# Altium PCB DAPLinkTiny.PcbDoc
Units mil, origin at the board's own origin, x right, y up, seen from the top; angles counter-clockwise.
Board outline 955.73 x 413.27 mil, 4 copper layers (Top Layer, POWER, GND, Bottom Layer), stack 23.756 mil thick; 17 components, 39 nets, 106 pads, 51 vias.
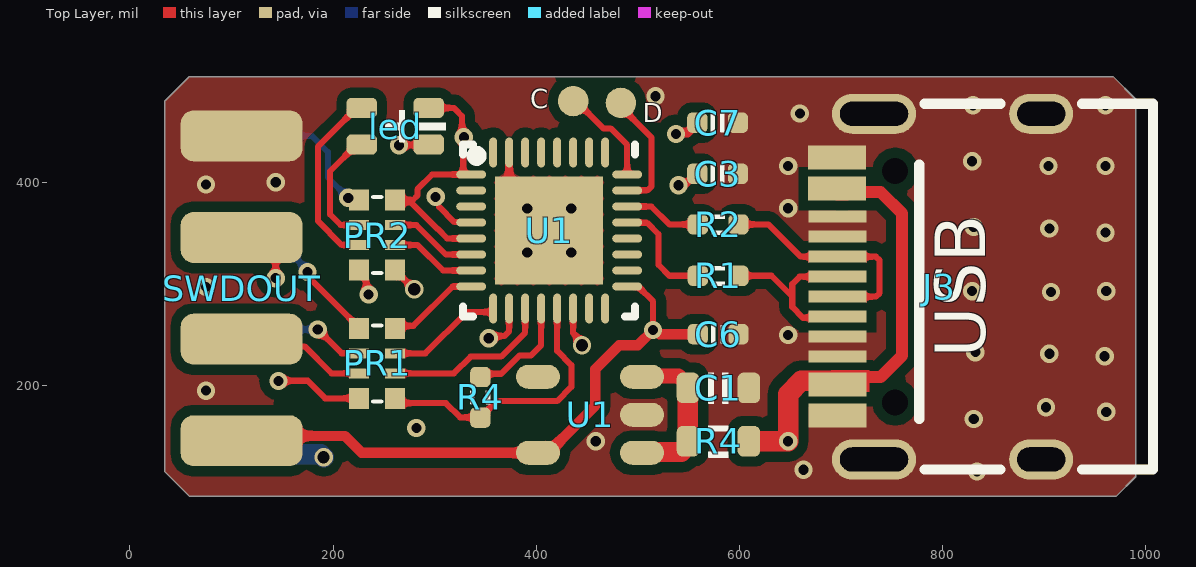
[diagram p0: Top Layer view]
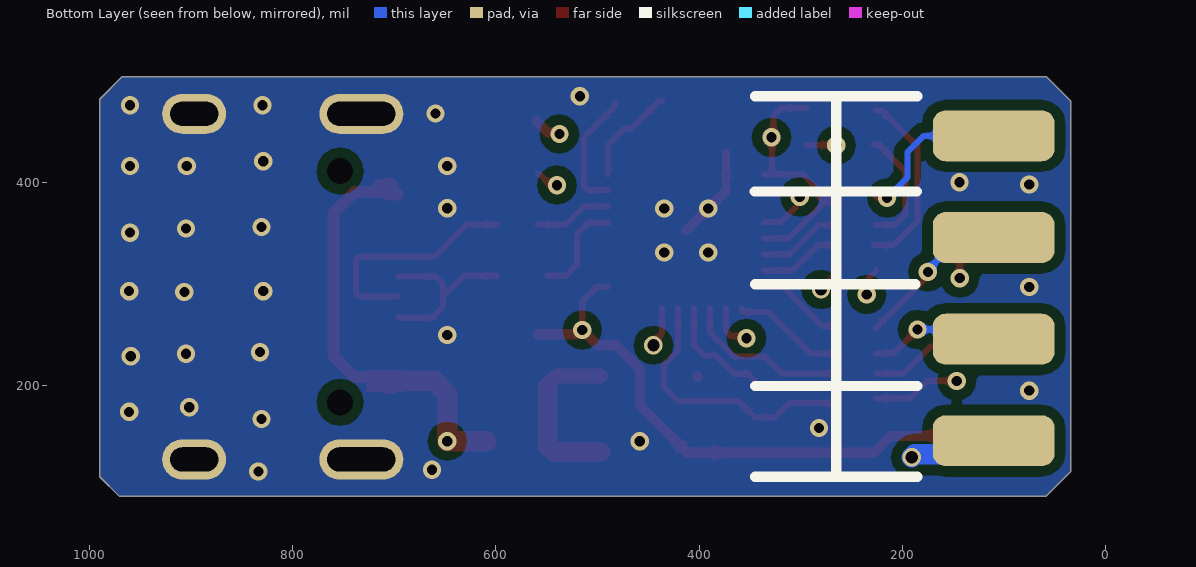
[diagram p1: Bottom Layer view, seen from below]
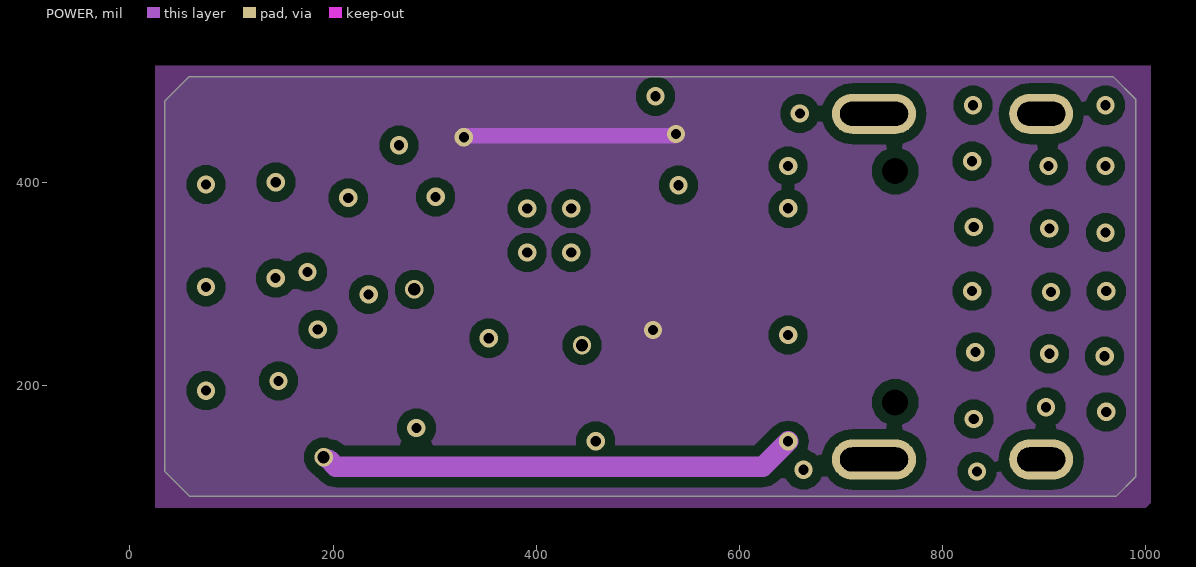
[diagram p2: POWER]
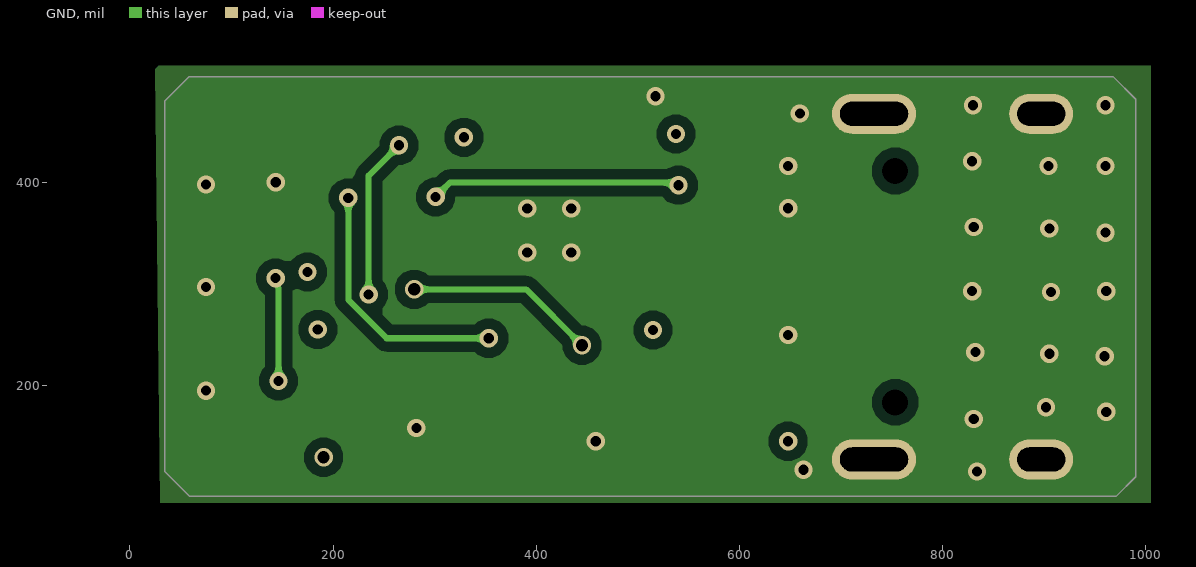
[diagram p3: GND]
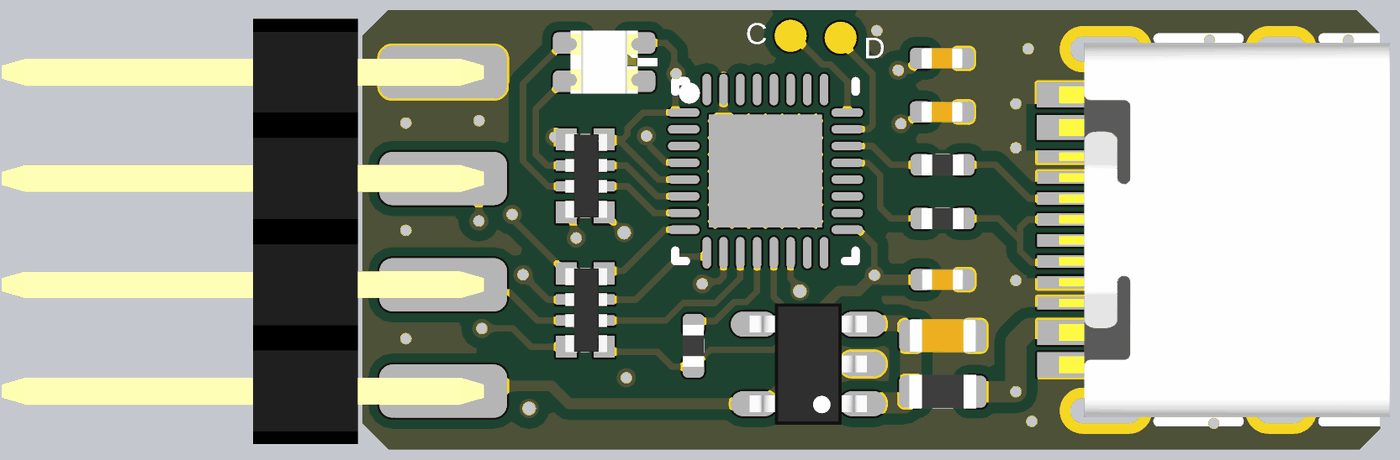
[diagram p4: 3D render of the assembled board from above, using the file's embedded part models]

## Layer stack, top to bottom
Top Solder: solder mask 0.4, Solder Resist, Dk 3.5
Top Layer: signal copper 1.4
Dielectric 2: prepreg 2.8, PP-006, Dk 4.1
POWER: signal copper 1.378
Dielectric 1: dielectric 12.6, FR-4, Dk 4.8
GND: signal copper 1.378
Dielectric 3: prepreg 2.8, PP-006, Dk 4.1
Bottom Layer: signal copper 1.4
Bottom Solder: solder mask 0.4, Solder Resist, Dk 3.5

## Board outline
34.27,115.73 58.9,91.1 691.96,91.1 970.6,91.1 990,110.5 990,482.18 967.8,504.38 58.36,504.38 34.27,480.29

## Design rules (kind name [scope] priority, off if disabled: settings)
Clearance ClearancePolygon [InPolygon] p1: gap=10 ignorepadtopadclearanceinfootprint=FALSE
Clearance [All] p2: gap=6 ignorepadtopadclearanceinfootprint=FALSE except(0: Arc-Hole Track-Hole SMDPad-Hole THPad-Hole Via-Hole Fill-Hole Poly-Hole Region-Hole Text-Hole)
ComponentClearance [All] p1: gap=0 collisioncheckmode=3 verticalgap=0 showdistances=FALSE
Height [All] p1: minheight=0 maxheight=5000 prefheight=500
HoleSize [All] p1: absolutevalues=TRUE maxlimit=200 minlimit=1 maxpercent=80.000 minpercent=20.000
HoleToHoleClearance [All] p1: gap=6 allowstackedmicrovias=TRUE
MinimumSolderMaskSliver [All] p1: minsoldermaskwidth=0
PolygonConnect [All] p1: connectstyle=Direct reliefconductorwidth=10 reliefentries=4 polygonreliefangle="90 Angle" airgapwidth=10
RoutingVias [All] p1: holewidth=12 width=24 viastyle="Through Hole" minholewidth=8 minwidth=15 maxholewidth=28 maxwidth=50
SMDNeckDown [All] p1: percent=50.000
SilkToSilkClearance [All] p1: silktosilkclearance=0
SilkToSolderMaskClearance [IsPad] p1: minsilkscreentomaskgap=0 clearancetoexposedcopper=TRUE
SolderMaskExpansion [All] p1: expansion=2 istentingtop=FALSE
Width [All] p1: maxlimit=50 minlimit=6 preferedwidth=6
23 further rules are at their usual default settings.

## Classes and differential pairs
component class JLink_ARM-OB_072_Sch: C1 C3 J1 R4 R6 R8 STM1 SWDOUT1 TypeC1

## Components (designator, comment, footprint, x,y, rotation, side; value= is the part's Value field where it differs from the comment)
C "Comment" PAD.04X.04#1 436.34,480.29 r0 top
C1 "10uF" CAP_0603 579.26,197.99 r180 top value=0.1u
C3 "100nF" CAP_0402 578.5,408.64 r180 top value=0.1u
C6 "100nF" CAP_0402 579,250.84 r180 top value=0.1u
C7 "100nF" CAP_0402 578.5,459.03 r180 top value=0.1u
D "Comment" PAD.04X.04#2 483.29,478.44 r0 top
J3 "USB type C" "USB Type-C-16Pin_A" 897,297.6 r90 top
led "Comment" LED_1616_RGB 261.19,455.53 r0 top
PR1 "100R" 0402_4R 244.46,221.2 r90 top
PR2 "2K" 0402_4R 244.46,347.47 r90 top
R1 "22R" RES_0402_2 579,308.32 r180 top
R2 "22R" RES_0402_2 579,358.85 r180 top
R4 "0R" RES_0603 579.26,145.43 r0 top value=680R
R4 "100R" RES_0402 345,188.68 r90 top value=470pf (schematic designator C2)
SWDOUT "HDR2x4_2.54" HDR2X4_2.54_180H 110,146 r180 top
U1 "Comment" SOT23-5 452.98,171.53 r180 top
U1 "Comment" QFN32_4*4 412.72,352.89 r0 top locked

## Footprints (in the part's own frame and the unit in brackets; to place one, negate y for a bottom-side part, rotate by r counter-clockwise, add the part's x,y. Pads: shape width x height; smd on the part's side, far side on the other; paste and mask are expansions set on the pad)
0402_4R [mm]
  rect 0.525x0.5 smd: 1(-0.85,-0.425) 4(0.9,-0.425) 5(0.9,0.475) 8(-0.85,0.475)
  rect 0.25x0.5 smd: 2(-0.225,-0.425) 3(0.275,-0.425) 6(0.275,0.475) 7(-0.225,0.475)
  silkscreen extent -0.93,-0.08 0.97,0.12, body extent -0.97,-0.5 1.03,0.5, height 0.45
CAP_0402 [mil]
  rrect50% 20x20 smd: 1(-20,0) 2(20,0)
  silkscreen extent -7,-9 7,9, body extent -20,-10 20,10, height 20
CAP_0603 [mil]
  rrect50% 22x30 smd: 1(-30,0) 2(30,0)
  silkscreen extent -10,-15 10,15, body extent -31,-16 31,16, height 31
HDR2X4_2.54_180H [mil]
  rrect50% 120x50 smd: 1(0,0) 3(0,-100) 5(0,-200) 7(0,-300)
  rrect50% 120x50 smd far side: 2(0,0) 4(0,-100) 6(0,-200) 8(0,-300)
  body extent -38,-350 415,50, height 100
LED_1616_RGB [mil]
  rrect50% 30x20 smd: 1(-33,-18) 2(-33,18) 3(33,18) 4(33,-18)
  silkscreen extent -10,-16 50,16, body extent -31,-30 31,30, height 13
PAD.04X.04#1 [mil]
  rrect100% 30x30 smd paste-78.74: TP2(0,0)
PAD.04X.04#2 [mil]
  rrect100% 30x30 smd paste-78.74: TP3(0,0)
QFN32_4*4 [mm]
  oval 0.75x0.2 smd: 1(-1.95,1.4) 2(-1.95,1) 3(-1.95,0.6) 4(-1.95,0.2) 5(-1.95,-0.2) 6(-1.95,-0.6) 7(-1.95,-1) 8(-1.95,-1.4) 17(1.95,-1.4) 18(1.95,-1) 19(1.95,-0.6) 20(1.95,-0.2) 21(1.95,0.2) 22(1.95,0.6) 23(1.95,1) 24(1.95,1.4)
  oval 0.2x0.75 smd: 9(-1.4,-1.95) 10(-1,-1.95) 11(-0.6,-1.95) 12(-0.2,-1.95) 13(0.2,-1.95) 14(0.6,-1.95) 15(1,-1.95) 16(1.4,-1.95) 25(1.4,1.95) 26(1,1.95) 27(0.6,1.95) 28(0.2,1.95) 29(-0.2,1.95) 30(-0.6,1.95) 31(-1,1.95) 32(-1.4,1.95)
  rect 2.7x2.7 smd: 33(0,0)
  silkscreen extent -2.15,-2.15 2.15,2.15, body extent -2.38,-2.38 2.38,2.38
RES_0402 [mil]
  rrect50% 20x20 smd: 1(-20,0) 2(20,0)
  silkscreen extent -7,-10 7,10, body extent -20,-10 20,10, height 14
RES_0402_2 [mil]
  rrect50% 20x20 smd: 1(-20,0) 2(20,0)
  silkscreen extent -7,-10 7,10, body extent -20,-10 20,10, height 14
RES_0603 [mil]
  rrect50% 22x30 smd: 1(-30,0) 2(30,0)
  silkscreen extent -10,-16 10,16, body extent -31,-16 32,16, height 18
SOT23-5 [mm] "SOT23-5"
  oval 1.1x0.6 smd: 1(-1.3,0.95) 2(-1.3,0) 3(-1.3,-0.95) 4(1.3,-0.95) 5(1.3,0.95)
  body extent -1.4,-1.45 1.4,1.45, height 1.45
"USB Type-C-16Pin_A" [mm]
  round 0 hole 0.65: 0(-2.89,3.65) 0(2.89,3.65)
  oval 1x1.6 hole 0.6 slot 1.2 at 90 deg: 1(-4.32,0) 1(4.32,0)
  oval 1x2.1 hole 0.6 slot 1.7 at 90 deg: 1(-4.32,4.18) 1(4.32,4.18)
  rect 0.3x1.45 smd: A1(-3.375,5.092) A4(-2.6,5.092) A5(-1.25,5.092) A6(-0.25,5.092) A7(0.25,5.092) A8(-1.75,5.092) A9(2.6,5.1) A12(3.375,5.1) B1(3.075,5.1) B4(2.3,5.1) B5(1.75,5.092) B6(0.75,5.092) B7(-0.75,5.092) B8(1.25,5.092) B9(-2.3,5.092) B12(-3.075,5.092)
  silkscreen extent -4.57,-2.79 4.57,3.05, body extent -4.47,-2.6 4.47,5.3, height 3.25

## Part data
C1 C3 C6 C7 R4: library part Cap_0603, "Capacitor"
J3: library part USB_C
R1 R2 R4: library part Res_0603, "Resistor"
SWDOUT: "Header"

## Via types
v1: diameter 18, hole 10, Top Layer to Bottom Layer, tented both sides, 48 vias
v2: diameter 18, hole 12, Top Layer to Bottom Layer, tented both sides, 3 vias

## Nets (pads, with @x,y where several pads share a name; then routed paths per layer and width w, separated by ;. In a path a pad name is that pad's centre, name@x,y a point inside that pad or via, vN(x,y) a via of type N, cw(c..) or ccw(c..) an arc to the next point about the centre after c; other vN are vias at no path point)
5V: C1.2 R4.1@549.26,145.43 U1.1@504.16,134.13 U1.3@504.16,208.93 | length 170.2
  Top Layer w15: U1.3@497.36,209.69 539.91,209.69 544.11,205.49 545.76,205.49 549.26,201.99 C1.2
  Top Layer w20: U1.1@497.43,134.82 517.26,134.82 517.33,134.89 542.72,134.89 549.26,141.43 C1.2
BOOT0: 
DN: J3.A7 J3.B7 R1.1 | length 181
  Top Layer w6: R1.1 631.55,308.32 651.92,287.95 ; J3.B7 695.51,267.05 662.51,267.05 651.92,277.63 651.92,287.95 ; J3.A7 659.15,307.44 651.92,300.21 651.92,287.95
DP: J3.A6 J3.B6 R2.1 | length 228.6
  Top Layer w6: R2.1 628.5,358.85 660.23,327.12 J3.B6 734.36,327.12 737.88,323.61 737.88,291.27 734.36,287.75 J3.A6
GND: C1.1 C3.1 C6.1 C7.1 J3.1 J3.A1 J3.A5 J3.A8 J3.A12 J3.B1 J3.B5 J3.B8 J3.B12 SWDOUT.7 U1.2@504.16,171.53 U1.31 U1.33 | length 93.1
  Top Layer w8: U1.33@373.35,392.26 U1.31
  Top Layer w9.92: U1.33@373.35,392.26 v1(391.06,374.55) U1.33
  other v1: 833.8,115.73 662.94,117.43 458.48,145.43 282.01,158.5 830.6,167.43 961,174.4 901.8,178.97 75,195.27 959.4,229.2 905,231.6 832.2,233.2 647.91,250 906.6,292.4 829,293.2 961,293.2 75,297.2 391.06,331.24 434.37,331.24 960.2,350.8 905,354.8 830.6,356.4 434.37,374.55 647.91,374.8 75,398.17 143.65,400.39 647.91,416.32 904.2,416.32 960.2,416.32 829,421.03 659.42,468.03 829.8,476.18 960.2,476.18 517.34,485.06
ISWCLK: C.TP2 U1.24 | length 100.1
  Top Layer w6: C.TP2 439.24,480.29 466.1,453.43 473.19,453.43 489.49,437.14 U1.24
ISWDIO: D.TP3 U1.23 | length 120.1
  Top Layer w6: D.TP3 483.29,474.53 486.22,471.59 513.25,444.56 513.25,396.14 509.74,392.62 489.85,392.62 U1.23
LED: 
LED_B: led.2 PR2.7 | length 181
  Top Layer w6: led.2@225.71,471.04 220.71,471.04 185,435.33 185,362.28 208.68,338.6 PR2.7@227.69,338.6
LED_G: led.1 PR2.6 | length 118.3
  Top Layer w6: PR2.6 207.57,358.29 197,368.86 197,411.33 222.11,436.45 222.11,437.53 led.1
LED_R: led.4 PR2.8 | length 216.6
  Top Layer w6: PR2.8 225.76,313.51 232.61,306.67 232.61,295.64 235,293.25 v1(235,290) ; v1(265,436.82) 265.35,437.18 293.84,437.18 led.4
  GND w6: v1(235,290) 235,406.82 v1(265,436.82)
NetC2_2: U1.4@401.8,208.93 | length 1.2
  Top Layer w10: U1.4@400.92,208.05 U1.4@401.8,208.93
NetD1_2: 
NetD2_2: 
NetR7_2: 
NetR9_2: 
NetR10_2: 
NetR11_2: 
PA0: PR2.3 U1.6 | length 84.8
  Top Layer w6: PR2.3@263.12,358.29 282.01,358.29 311.03,329.27 U1.6
PA1: PR2.2 U1.7 | length 83.2
  Top Layer w6: PR2.2@263.12,338.6 283.29,338.6 308.37,313.52 U1.7
PA2: PR1.4 U1.8 | length 88.9
  Top Layer w6: PR1.4@263.12,259.05 279.05,259.05 317.78,297.78 U1.8
PA3: PR1.3 U1.9 | length 116.2
  Top Layer w6: PR1.3 290.79,232.02 331.39,272.62 356.73,272.62 357.6,273.48 U1.9
PA4: PR2.5 SWDOUT.8 U1.10 | length 458.7
  Top Layer w6: v1(215,385) 224.46,385 PR2.5@227.69,388.23 ; v1(353.31,246.85) 355.61,249.15 368.8,249.15 373.35,253.69 U1.10
  GND w6: v1(215,385) 215,284.54 252.69,246.85 v1(353.31,246.85)
  Bottom Layer w6: SWDOUT.8 179,446.03 195,430.03 195,405 v1(215,385)
PA5: PR1.2 U1.11 | length 168.2
  Top Layer w6: PR1.2 318.85,212.33 335.37,228.85 365.48,228.85 389.09,252.47 U1.11
PA6: R4.2@345,208.68 U1.12 | length 111.5
  Top Layer w6: R4.2@345,204.04 345,205.04 351.85,211.89 365.49,211.89 383.34,229.74 394.74,229.74 404.84,239.84 U1.12
PA7: PR1.1 R4.1@345,168.68 U1.13 | length 276.8
  Top Layer w6: PR1.1 265.94,182.99 311.05,182.99 325.04,169 344.69,169 R4.1@345,168.68 ; R4.1@344.84,168.84 360.95,184.95 420.5,184.95 434.57,199.02 434.57,220.43 420.59,234.41 U1.13
PB0: PR2.1 U1.14 | length 248
  Top Layer w6: PR2.1 261.19,313.51 279.7,295 v2(280,295) ; U1.14 436.34,251.91 v2@442.7,245.54
  GND w6: v2(280,295) 390,295 v2(445,240)
RST: C3.2 U1.4@335.94,360.77 | length 306.8
  Top Layer w6: 304.43,376.18 319.48,361.13 335.59,361.13 U1.4@335.94,360.77 ; v1(539.91,397.51) 542.21,399.8 548.58,399.8 557.42,408.64 C3.2
  GND w6: v1(300.99,385.99) 314.96,399.96 v1@537.45,399.96
  Bottom Layer w6: v1@537.45,399.96 v1(539.91,397.51)
SWDCLK: PR1.7 SWDOUT.3 | length 134.3
  Top Layer w6: SWDOUT.3@145.06,246 125.24,246 132.44,238.8 171.98,238.8 198.45,212.33 PR1.7
SWDIO: PR1.8 SWDOUT.5 | length 250
  Top Layer w6: SWDOUT.5 122.22,346 143.5,324.72 v1(143.5,306) ; v1(146.37,204.86) 146.53,205.02 175.06,205.02 192.34,187.73 PR1.8
  GND w6: v1(143.5,306) 145.79,303.7 145.79,297.06 146.37,296.49 v1(146.37,204.86)
TRX: PR1.6 SWDOUT.4 | length 129.4
  Top Layer w6: v1(185,255.52) 208.49,232.02 PR1.6
  Bottom Layer w6: SWDOUT.4 119.51,255.51 v1(185,255.52)
TSWC: 
TSWD: 
TSWO: 
TTX: PR1.5 SWDOUT.6 | length 156.6
  Top Layer w6: v1(174.83,312.14) 177.12,309.85 177.12,305.77 225.76,257.13 PR1.5
  Bottom Layer w6: SWDOUT.6 142.99,346 174.83,314.16 v1(174.83,312.14)
USB_DN: R1.2 U1.21 | length 98.9
  Top Layer w6: U1.21 489.85,360.41 509.09,360.41 520.3,349.2 520.3,319.02 531,308.32 R1.2@549,308.32
USB_DP: R2.2 U1.22 | length 76.8
  Top Layer w6: U1.22 513.33,376.52 531,358.85 R2.2
VDD: C6.2 C7.2 led.3 PR2.4 SWDOUT.1 U1.1@335.94,408.01 U1.5 U1.17 | length 1104.5
  Top Layer w6: led.3 318.93,473.53 321.39,471.06 326.85,465.6 v1@326.85,445.87 ; 302.47,354.8 276.52,380.75 268.04,380.75 268.04,382.82 264.33,386.53 261.19,383.39 PR2.4 278.67,382.9 282.99,387.21 282.99,393.44 297.56,408.01 U1.1@327.49,408.01 ; 302.48,354.8 302.88,354.4 312.25,345.02 U1.5@335.94,345.02 ; v1@328.12,444.6 328.12,408.64 U1.1@327.49,408.01 ; U1.1@335.94,408.01 U1.1@327.49,408.01 ; U1.17 490.1,297.16 500.93,297.16 515,283.09 v1(515,255)
  Top Layer w10: SWDOUT.1 114.78,150.78 211.52,150.78 228.17,134.13 401.8,134.13 411.64,134.13 458.06,180.55 458.06,216.31 481.75,240 500,240 v1(515,255) 517.16,255 521.32,250.84 C6.2 ; v1(537.45,447.81) 538.98,449.34 548.82,449.34 C7.2@560.03,460.56
  POWER w15: v1@330.33,446.21 v1@535.85,446.21
  Bottom Layer w6: v1(328.72,444.6) v1@330.33,446.21 ; v1@535.85,446.21 v1(537.45,447.81)
VUSB: J3.A4 J3.A9 J3.B4 J3.B9 R4.2@609.26,145.43 SWDOUT.2 | length 1007.7
  Top Layer w11.81: J3.B4 J3.B4@705.71,388.15 ; J3.B9@700.45,204.86 704.1,208.51 738.82,208.51 760,229.7 760,369.75 739.03,390.72 J3.B4@721.42,390.72 ; J3.B4@705.71,388.58 J3.B4@707.84,390.72 ; J3.B4@705.71,390.72 J3.B4@707.84,390.72 ; J3.B4@707.84,390.72 714.63,397.51 J3.B4@721.42,390.72 ; J3.B4@707.84,390.72 J3.B4@721.42,390.72
  Top Layer w20: R4.2@609.26,145.43 v1(647.91,145.43) 647.91,191.96 660.82,204.86 700.45,204.86 703.29,202.02 J3.B9@705.71,202.02 ; J3.A9@705.37,394.83 J3.A9@705.71,394.49
  POWER w20: v2@195.56,127.53 202.66,120.43 622.91,120.43 v1(647.91,145.43)
  Bottom Layer w20: SWDOUT.2 123.46,132.54 187.86,132.54 v2(190.73,129.68)
pads on no net: J3.0 U1.2@335.94,392.26 U1.3@335.94,376.52 U1.15 U1.16 U1.18 U1.19 U1.20 U1.25 U1.26 U1.27 U1.28 U1.29 U1.30 U1.32

## Polygon pours and split planes (outlines as drawn)
VDD on POWER "VDD_L02_P008" (solid, remove dead copper, pour order 8): 25,515 1005,515 1005,85 1000,80 25,80
GND on Top Layer "GND_L01_P006" (solid, remove dead copper, pour order 6): 34.27,480.29 58.36,504.38 967.8,504.38 990,482.18 990,110.5 970.6,91.1 58.9,91.1 34.27,115.73
GND on Bottom Layer "GND_L04_P007" (solid, remove dead copper, pour order 7): 34.27,480.29 58.36,504.38 967.8,504.38 990,482.18 990,110.5 970.6,91.1 58.9,91.1 34.27,115.73
GND on GND "GND_L03_P009" (solid, remove dead copper, pour order 9): 25,515 1005,515 1005,85 30,85

## Other copper
Top Layer:
  rectangle net VUSB: 690,194.13 727.78,215.6

## Silkscreen, mask and mechanical layers (free items; w line width, h text height)
Bottom Overlay:
  lines w10: 185,110.5 345,110.5 ; 185,200 345,200 ; 185,485 345,485 ; 185.4,391.18 345.4,391.18 ; 187.13,300 345,300 ; 265,115 265,485
Bottom Solder:
  drawing of 870 lines, arcs and shapes, not listed
  text "RST" at 290.42,405 h40 r270
  text "GND" at 215.42,400 h40 r270
  text "DAPLink Tiny" at 737.88,316.84 h50
  text "DIO" at 215.42,315.12 h40 r270
  text "TXD" at 290,305 h40 r270
  text "CLK" at 215.42,212.33 h40 r270
  text "RXD" at 292.69,212.33 h40 r270
  text "R" at 705.71,175 h90
  text "5V" at 290.42,140 h40 r270
  text "3V3" at 215.44,125.62 h40 r270
Mechanical 1:
  lines w10: 34.27,115.73 34.27,480.29 58.36,504.38 691.45,504.38 967.8,504.38 990,482.18 990,110.5 970.6,91.1 691.96,91.1 58.9,91.1 34.27,115.73

## Text inside footprints (layer, text, board x,y; h text height)
J3: Top Overlay "USB" at 842,227.6 h50 r90